# Altium PCB exercise3.PcbDoc
Units mil, origin at the board's own origin, x right, y up, seen from the top; angles counter-clockwise.
Board outline 3910 x 2550 mil, 2 copper layers (Top Layer, Bottom Layer); 24 components, 20 nets, 74 pads, 3 vias.
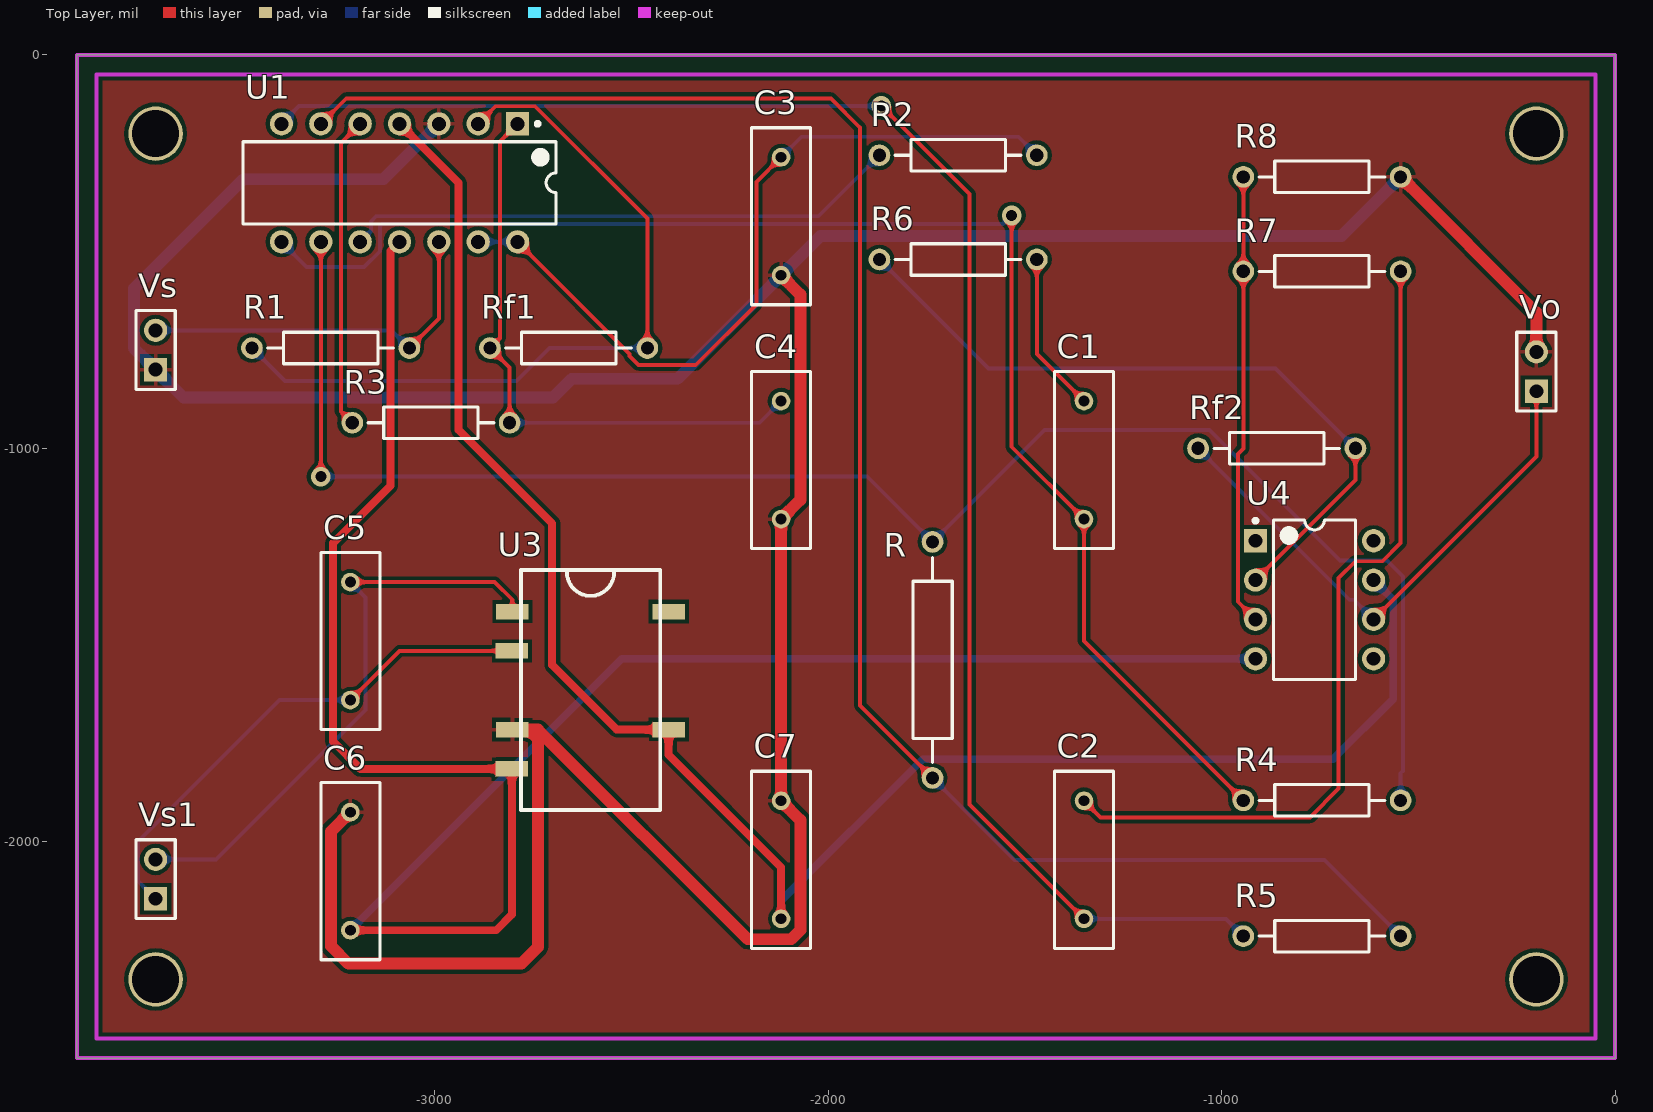
[diagram p0: Top Layer view]
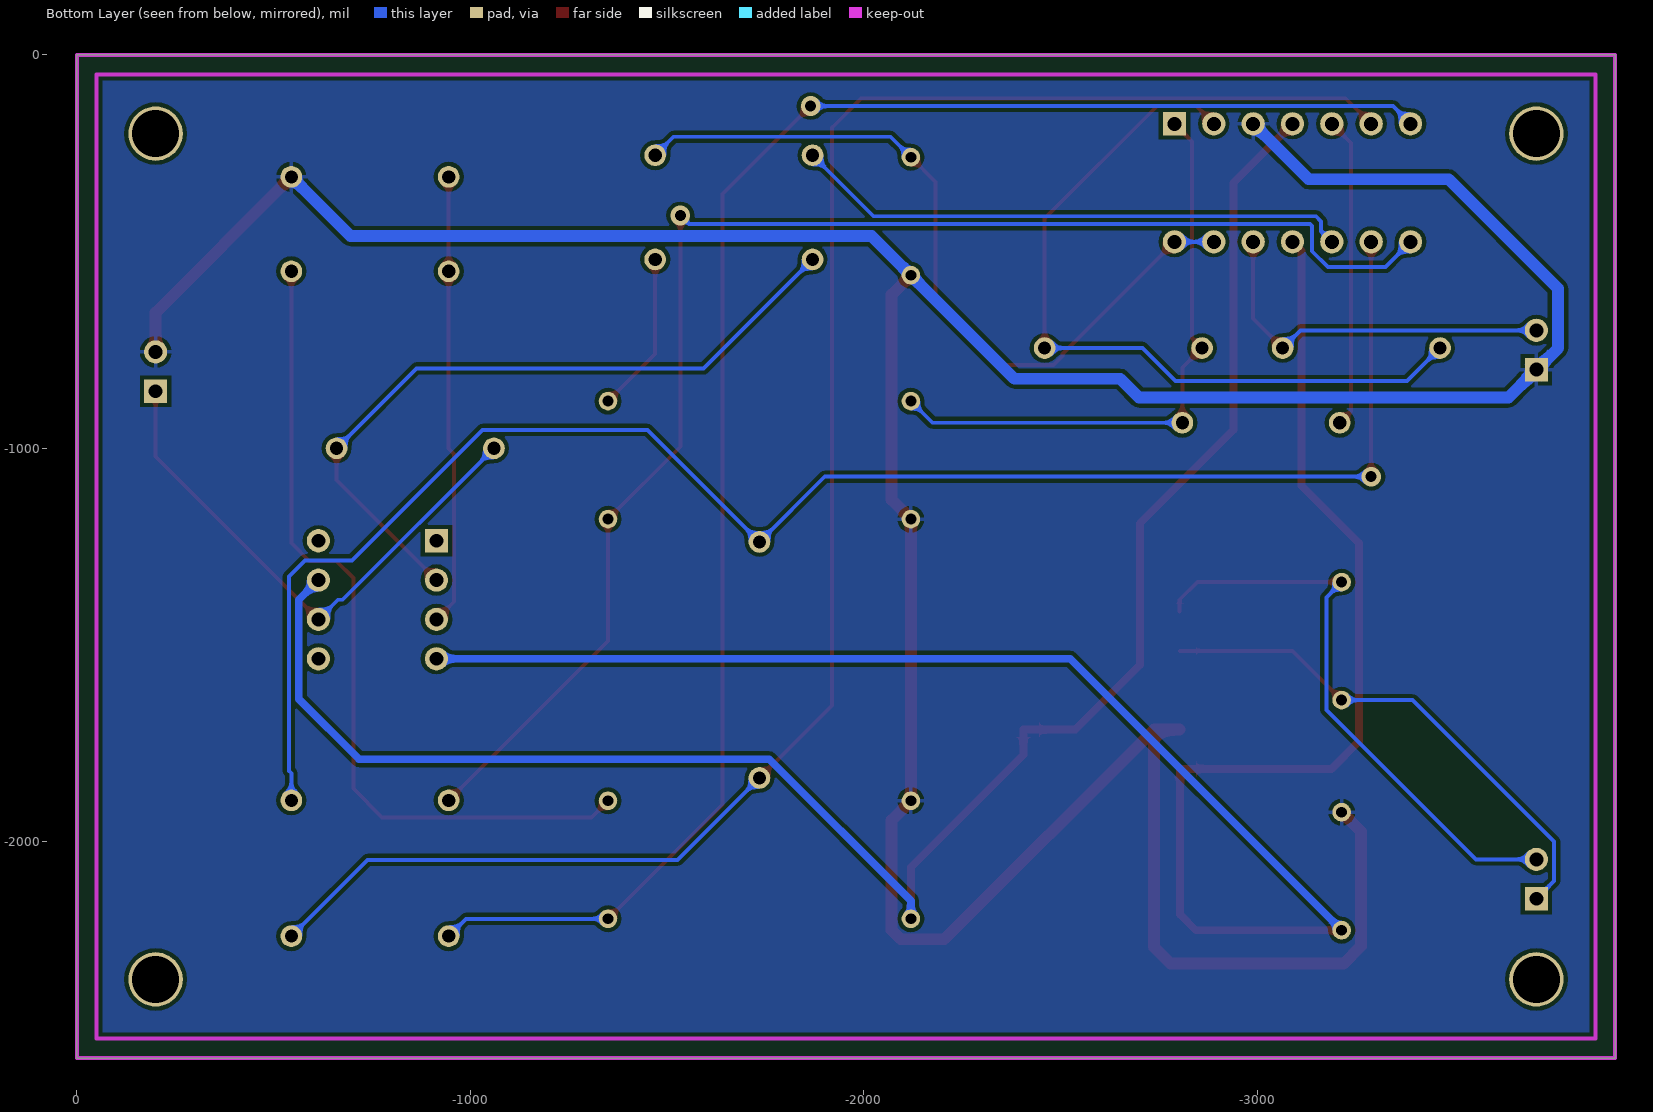
[diagram p1: Bottom Layer view, seen from below]

## Layer stack, top to bottom
Top Solder: solder mask 0.4, Solder Resist, Dk 3.5
Top Layer: signal copper 1.4
Dielectric 1: dielectric 12.6, FR-4, Dk 4.8
Bottom Layer: signal copper 1.4
Bottom Solder: solder mask 0.4, Solder Resist, Dk 3.5

## Board outline
-3910,-2550 -3910,0 0,0 0,-2550

## Design rules (kind name [scope] priority, off if disabled: settings)
Clearance all_to_GND [All] p1: gap=10 ignorepadtopadclearanceinfootprint=FALSE except(0: Arc-Hole Track-Hole SMDPad-Hole THPad-Hole Via-Hole Fill-Hole Poly-Hole Region-Hole Text-Hole)
Clearance all_to_all1 [All] p2: gap=10 ignorepadtopadclearanceinfootprint=FALSE except(0: Arc-Hole Track-Hole SMDPad-Hole THPad-Hole Via-Hole Fill-Hole Poly-Hole Region-Hole Text-Hole)
Clearance GND_to_all [InNet('GND')] p3: gap=10 ignorepadtopadclearanceinfootprint=FALSE except(0: Arc-Hole Track-Hole SMDPad-Hole THPad-Hole Via-Hole Fill-Hole Poly-Hole Region-Hole Text-Hole)
PolygonConnect [All] p1: connectstyle=Relief reliefconductorwidth=10 reliefentries=4 polygonreliefangle="90 Angle" airgapwidth=10
RoutingVias [All] p1: holewidth=28 width=50 viastyle="Through Hole" minholewidth=28 minwidth=50 maxholewidth=28 maxwidth=50
SolderMaskExpansion [All] p1: expansion=4
Width GND [InNet('GND')] p1: maxlimit=30 minlimit=30 preferedwidth=30 minimp=50.000000 maximp=50.000000 favimp=50.000000
Width VCC [InNet('VCC')] p2: maxlimit=20 minlimit=20 preferedwidth=20 minimp=50.000000 maximp=50.000000 favimp=50.000000
Width VEE [InNet('VEE')] p3: maxlimit=20 minlimit=20 preferedwidth=20 minimp=50.000000 maximp=50.000000 favimp=50.000000
Width all_to_all [All] p4: maxlimit=10 minlimit=10 preferedwidth=10
30 further rules are at their usual default settings.

## Classes and differential pairs
component class exercise1_1: C1 C2 C3 C4 R R1 R2 R3 R4 R5 R6 R7 R8 Rf1 Rf2 U1 U4 Vo Vs
component class exercise2: C5 C6 C7 U3 Vs1

## Components (designator, comment, footprint, x,y, rotation, side; value= is the part's Value field where it differs from the comment)
C1 "Cap" RAD-0.3 -1350,-1030 r90 top
C2 "Cap" RAD-0.3 -1350,-2046 r90 top
C3 "" RAD-0.3 -2120,-410 r90 top
C4 "Cap" RAD-0.3 -2120,-1030 r90 top
C5 "Cap" RAD-0.3 -3215,-1490 r90 top
C6 "Cap" RAD-0.3 -3215,-2075 r90 top
C7 "Cap" RAD-0.3 -2120,-2046 r90 top
R "Res Adj2" AXIAL-0.6 -1735,-1538 r90 top
R1 "Res2" AXIAL-0.4 -3265,-745 r180 top
R2 "Res2" AXIAL-0.4 -1670,-255 r180 top
R3 "Res2" AXIAL-0.4 -3010,-935 r180 top
R4 "Res2" AXIAL-0.4 -745,-1895 r180 top
R5 "Res2" AXIAL-0.4 -745,-2240 r180 top
R6 "Res2" AXIAL-0.4 -1670,-520 r180 top
R7 "Res2" AXIAL-0.4 -745,-550 r180 top
R8 "Res2" AXIAL-0.4 -745,-310 r180 top
Rf1 "Res2" AXIAL-0.4 -2660,-745 r180 top
Rf2 "Res2" AXIAL-0.4 -860,-1000 r180 top
U1 "LM124AJ" J14A -3090,-325 r270 top
U3 "DC-DC" DC-DC -2605,-1615 r270 top
U4 "LM741CN" N08E -764,-1385 r0 top
Vo "CON2" HDR1X2 -200,-855 r90 top
Vs "CON1" HDR1X2 -3710,-800 r90 top
Vs1 "CON" HDR1X2 -3710,-2145 r90 top

## Footprints (in the part's own frame and the unit in brackets; to place one, negate y for a bottom-side part, rotate by r counter-clockwise, add the part's x,y. Pads: shape width x height; smd on the part's side, far side on the other; paste and mask are expansions set on the pad)
AXIAL-0.4 [mm] "Axial Device, Thru-Hole; 2 Leads; 0.4 in Pin Spacing"
  round 1.4 hole 0.85: 1(-5.08,0) 2(5.08,0)
  silkscreen extent -4.06,-1.02 4.06,1.02
AXIAL-0.6 [mm] "Axial Device, Thru-Hole; 2 Leads; 0.6 in Pin Spacing"
  round 1.4 hole 0.85: 1(-7.62,0) 2(7.62,0)
  silkscreen extent -6.6,-1.27 6.6,1.27
DC-DC [mm]
  rect 1x2.1 smd: 1(-5.08,-5.035) 2(-2.54,-5.065) 4(2.54,-5.035) 5(5.08,-5.065) 7(2.54,5.065) 10(-5.08,5.065)
  silkscreen extent -7.77,-4.48 7.73,4.52
HDR1X2 [mm] "Connector; Header; 2 Position"
  rect 1.5x1.5 hole 0.9: 1(0,0)
  round 1.5 hole 0.9: 2(2.54,0)
  silkscreen extent -1.27,-1.27 3.81,1.27
J14A [mm] "DIP, 14-Leads, Row Spacing 7.62mm, Pitch 2.54mm, Body 19.56x6.73mm"
  rect 1.5x1.5 hole 0.9: 1(-3.81,7.62)
  round 1.5 hole 0.9: 2(-3.81,5.08) 3(-3.81,2.54) 4(-3.81,0) 5(-3.81,-2.54) 6(-3.81,-5.08) 7(-3.81,-7.62) 8(3.81,-7.62) 9(3.81,-5.08) 10(3.81,-2.54) 11(3.81,0) 12(3.81,2.54) 13(3.81,5.08) 14(3.81,7.62)
  silkscreen extent -3.93,-10.1 2.65,10.1, body extent -3.6,-10.1 3.6,10.1, height 5.08
N08E [mm] "DIP, 8-Leads, Row Spacing 7.62mm, Pitch 2.54mm, Body 9.91x6.35mm"
  rect 1.5x1.5 hole 0.9: 1(-3.81,3.81)
  round 1.5 hole 0.9: 2(-3.81,1.27) 3(-3.81,-1.27) 4(-3.81,-3.81) 5(3.81,-3.81) 6(3.81,-1.27) 7(3.81,1.27) 8(3.81,3.81)
  silkscreen extent -3.93,-5.15 2.65,5.23, body extent -3.6,-5.15 3.6,5.15, height 5.34
RAD-0.3 [mm] "Radial Cap, Thru-Hole; 2 Leads; 0.3 in Pin Spacing"
  round 1.2 hole 0.7: 1(-3.81,0) 2(3.81,0)
  silkscreen extent -5.71,-1.91 5.71,1.91

## Part data
C1 C2 C4 C5 C6 C7: "Capacitor"
C3: library part Cap, "Capacitor"
R: "Variable Resistor"
R1 R2 R3 R4 R5 R6 R7 R8 Rf1 Rf2: "Resistor"
U1: "Low Power Quad Operational Amplifier, 14-pin CerDIP"
U4: "Operational Amplifier, 8-pin MDIP"
Vo Vs Vs1: library part "Header 2", "Header, 2-Pin"

## Free pads (board coordinates)
  round 138 hole 120: 1(-3710,-2350) 2(-200,-2350) 3(-200,-200) 4(-3710,-200)

## Via types
v1: diameter 50, hole 28, Top Layer to Bottom Layer, 3 vias

## Nets (pads, with @x,y where several pads share a name; then routed paths per layer and width w, separated by ;. In a path a pad name is that pad's centre, name@x,y a point inside that pad or via, vN(x,y) a via of type N, cw(c..) or ccw(c..) an arc to the next point about the centre after c; other vN are vias at no path point)
GND: C3.1 C4.1 C6.2 C7.2 R8.1 U1.3 U3.4 Vo.2 Vs.1 | length 9365.5
  Top Layer w30: C6.2 -3264,-1974 -3264,-2266 -3220,-2310 -2780,-2310 -2738,-2268 -2738,-1737 -2760,-1715 ; U3.4 -2760,-1715 ; C3.1 -2071,-609 -2071,-1131 C4.1 C7.2 -2071,-1945 -2071,-2225 -2094,-2248 -2205,-2248 -2738,-1715 -2760,-1715 ; R8.1 -200,-655 Vo.2
  Bottom Layer w30: U1.3 -3131,-316 -3487,-316 -3765,-594 -3765,-745 Vs.1 -3639,-871 -2700,-871 -2652,-823 -2383,-823 C3.1 -2020.5,-460.5 -695.5,-460.5 R8.1
NetC1_1: C1.1 R4.2 U1.8 | length 3705.2
  Top Layer w10: v1(-1534,-408) -1534,-996 C1.1 -1350,-1490 R4.2
  Bottom Layer w10: U1.8 -3326,-539 -3180,-539 -3140,-499 -3140,-435 -3135,-430 -1556,-430 v1(-1534,-408)
NetC1_2: C1.2 R6.1 | length 409.7
  Top Layer w10: R6.1 -1470,-760 C1.2
NetC2_1: C2.1 R5.2 U1.7 | length 4246.2
  Top Layer w10: v1(-1865,-130) -1641,-354 -1641,-1905 C2.1
  Bottom Layer w10: U1.7 -3345,-130 v1(-1865,-130) ; C2.1 -989,-2196 R5.2
NetC2_2: C2.2 R7.1 | length 2115.5
  Top Layer w10: C2.2 -1308,-1938 -776,-1938 -703,-1865 -703,-1330 -660,-1287 -591,-1287 -545,-1241 R7.1
NetC3_2: C3.2 R2.1 U1.13 U1.14 | length 1994.5
  Top Layer w10: U1.14 -2505,-760 -2505,-765 -2482,-788 -2337,-788 -2183,-634 -2183,-323 C3.2
  Bottom Layer w10: U1.13 U1.14 ; C3.2 -2068,-208 -1517,-208 R2.1
NetC4_2: C4.2 R3.1 Rf1.2 U1.1 | length 1522.5
  Top Layer w10: R3.1 -2810,-795 Rf1.2 -2835,-720 -2835,-220 U1.1
  Bottom Layer w10: R3.1 -2175,-935 C4.2
NetC5_2: C5.2 U3.1 Vs1.2 | length 1493
  Top Layer w10: C5.2 -2848.22,-1340 -2803.22,-1385 U3.1
  Bottom Layer w10: Vs1.2 -3556,-2045 -3176,-1665 -3176,-1379 C5.2
NetR1_1: R1.1 U1.12 Vs.2 | length 964.7
  Top Layer w10: R1.1 -2990,-670 U1.12
  Bottom Layer w10: Vs.2 -3110,-700 R1.1
NetR1_2: R1.2 Rf1.1 U1.2 | length 1970.3
  Top Layer w10: U1.2 -2845.47,-130.47 -2745.47,-130.47 -2460,-415.94 Rf1.1
  Bottom Layer w10: R1.2 -3381,-829 -2793,-829 -2709,-745 Rf1.1
NetR2_2: R2.2 U1.10 | length 1425.8
  Bottom Layer w10: U1.10 -3162.97,-447.97 -3162.97,-422.97 -3150,-410 -2025,-410 R2.2
NetR3_2: R3.2 U1.5 | length 792.3
  Top Layer w10: R3.2 -3239,-906 -3239,-224 U1.5
NetR4_1: R4.1 R.2 U1.9 | length 4260.8
  Top Layer w10: v1(-3290,-1072) U1.9
  Bottom Layer w10: v1(-3290,-1072) -1901,-1072 R.2 -1450,-953 -1031,-953 -699,-1285 -580,-1285 -539,-1326 -539,-1820 -545,-1826 R4.1
NetR5_1: R5.1 R.1 U1.6 | length 4514.3
  Top Layer w10: U1.6 -3225.47,-110.47 -1993.53,-110.47 -1919,-185 -1919,-1654 R.1
  Bottom Layer w10: R.1 -1527,-2046 -739,-2046 R5.1
NetR6_2: R6.2 Rf2.1 U4.2 | length 1849
  Top Layer w10: U4.2 -660,-1081 Rf2.1
  Bottom Layer w10: R6.2 -1593,-797 -863,-797 Rf2.1
NetR7_2: R7.2 R8.2 U4.3 | length 1149.4
  Top Layer w10: R8.2 R7.2 -945,-1000 -959,-1014 -959,-1390 U4.3
NetRf2_2: Rf2.2 U4.6 Vo.1 | length 1377.7
  Top Layer w10: U4.6 -200,-1021 Vo.1
  Bottom Layer w10: Rf2.2 -675,-1385 -664,-1385 U4.6
VCC: C7.1 U1.4 U3.7 U4.7 | length 4637.5
  Top Layer w20: U1.4 -2940,-325 -2940,-953 -2702,-1191 -2702,-1551 -2538,-1715 U3.7@-2406,-1715 ; U3.7 U3.7@-2406,-1715 ; C7.1 -2120,-2065 -2406,-1779 U3.7@-2406,-1715
  Bottom Layer w20: C7.1 -2120,-2150.44 -1760,-1790.44 -717.44,-1790.44 -564,-1637 -564,-1385 U4.7
VEE: C6.1 U1.11 U3.5 U4.4 | length 5207.5
  Top Layer w20: C6.1 -2844.42,-2225 -2804.42,-2185 U3.5 -3189,-1815 -3259,-1745 -3259,-1241 -3113,-1095 -3113,-498 U1.11
  Bottom Layer w20: C6.1 -2525,-1535 U4.4
VIN: C5.1 U3.2 Vs1.1 | length 1315.1
  Top Layer w10: C5.1 -3090,-1515 U3.2
  Bottom Layer w10: Vs1.1 -3755,-2100 -3755,-2000 -3395,-1640 C5.1
pads on no net: U3.10 U4.1 U4.5 U4.8

## Polygon pours and split planes (outlines as drawn)
GND on Top Layer (solid, remove dead copper, pour order 16): -3910,0 0,0 0,-2550 -3910,-2550
GND on Bottom Layer (solid, remove dead copper, pour order 18): -3910,0 0,0 0,-2550 -3910,-2550

## Keep-outs
Keep-Out Layer:
  lines w10: -3910,-2550 -3910,0 0,0 0,-2550 -3910,-2550 ; -3860,-2500 -3860,-50 -50,-50 -50,-2500 -3860,-2500